# Altium PCB Test.PcbDoc
Units mil, origin at the board's own origin, x right, y up, seen from the top; angles counter-clockwise.
Board outline 5858 x 3543 mil, 2 copper layers (Top Layer, Bottom Layer); 36 components, 38 nets, 182 pads, 0 vias.
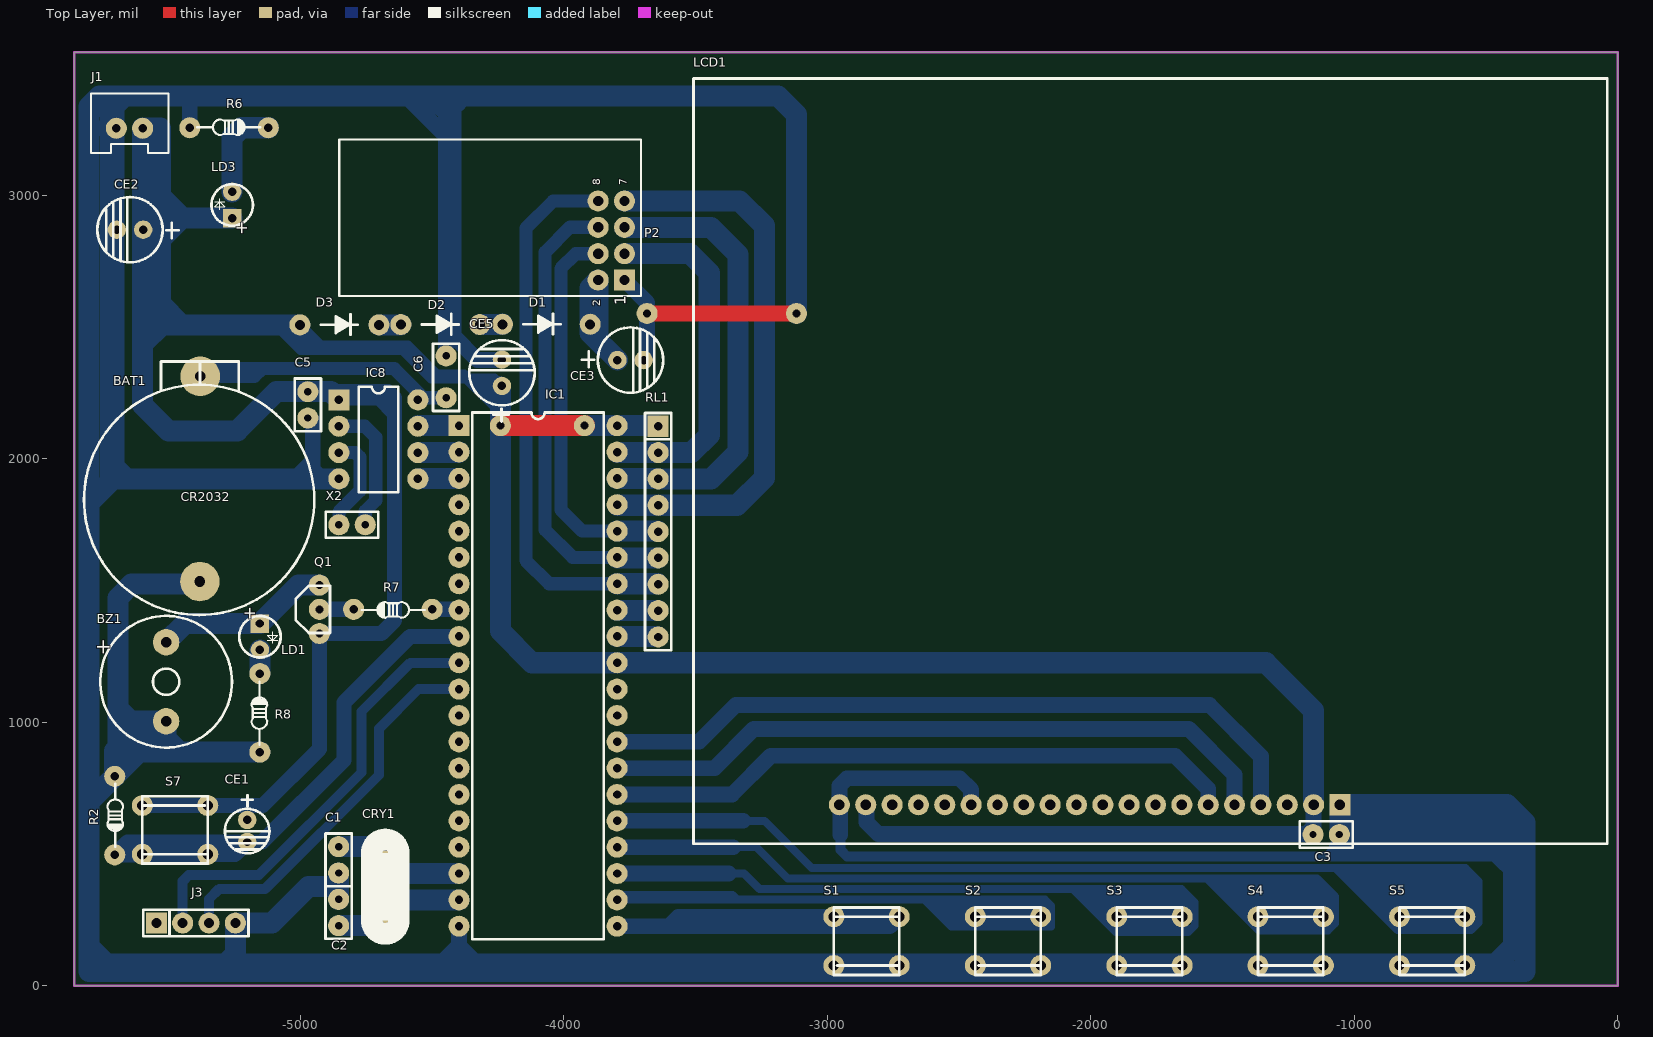
[diagram p0: Top Layer view]
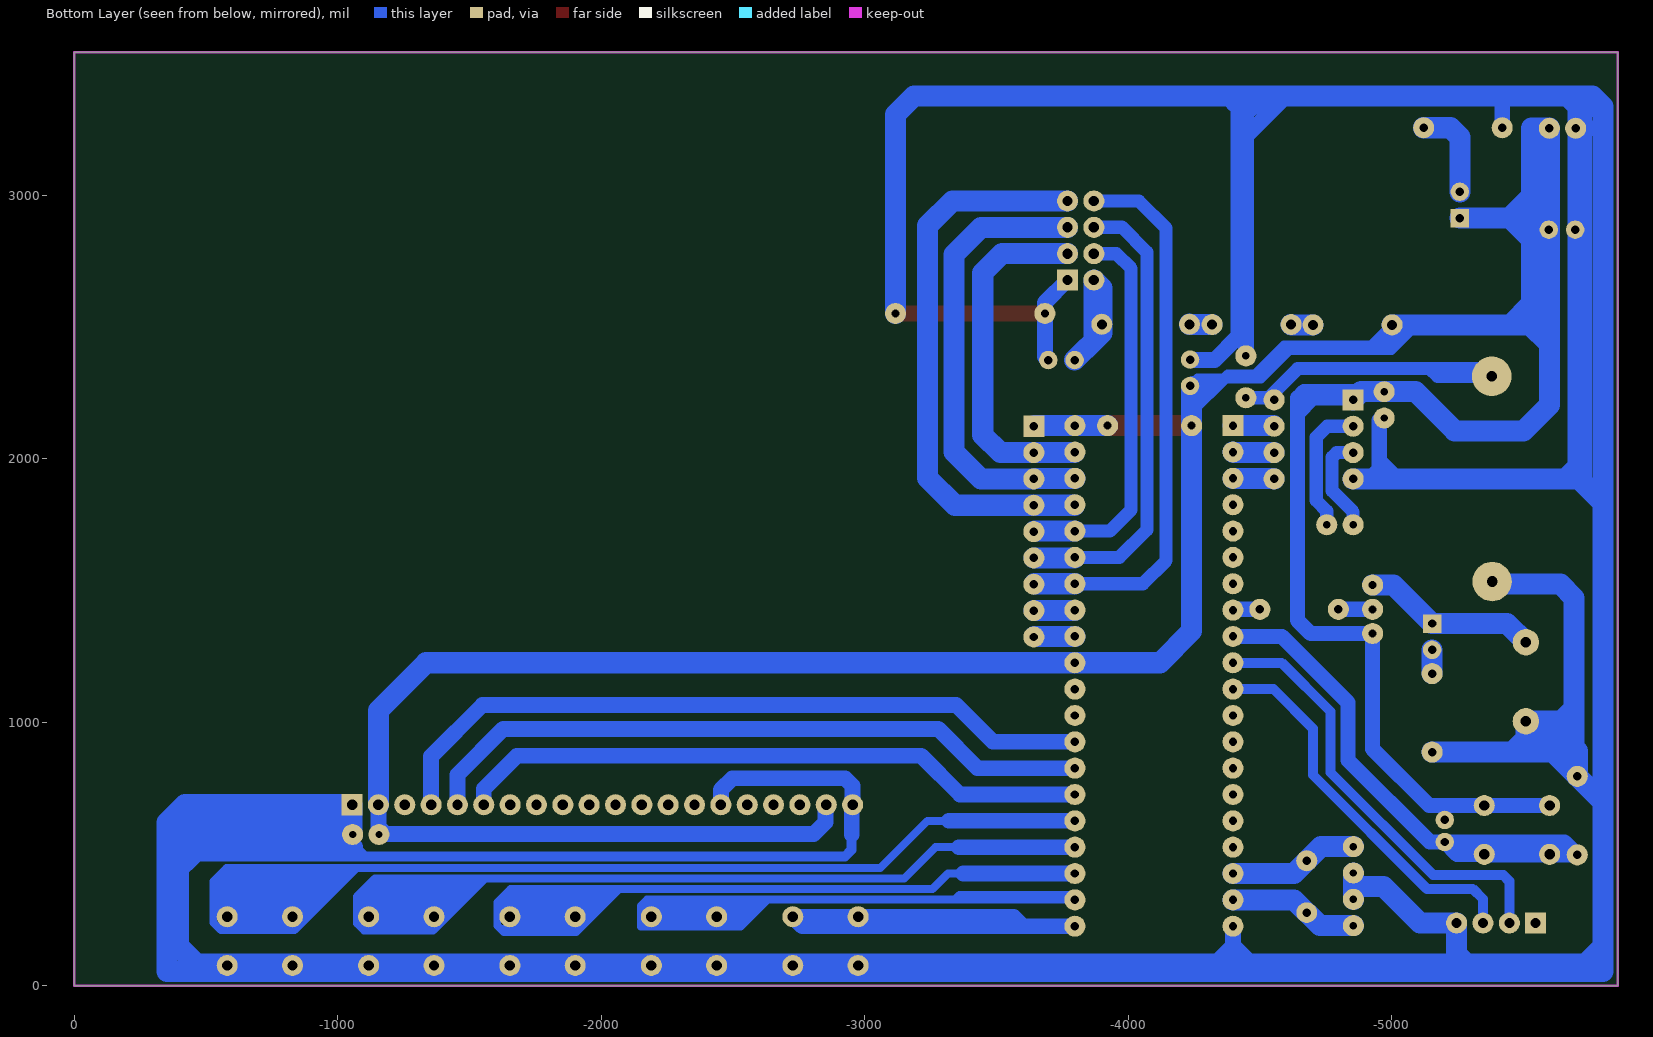
[diagram p1: Bottom Layer view, seen from below]
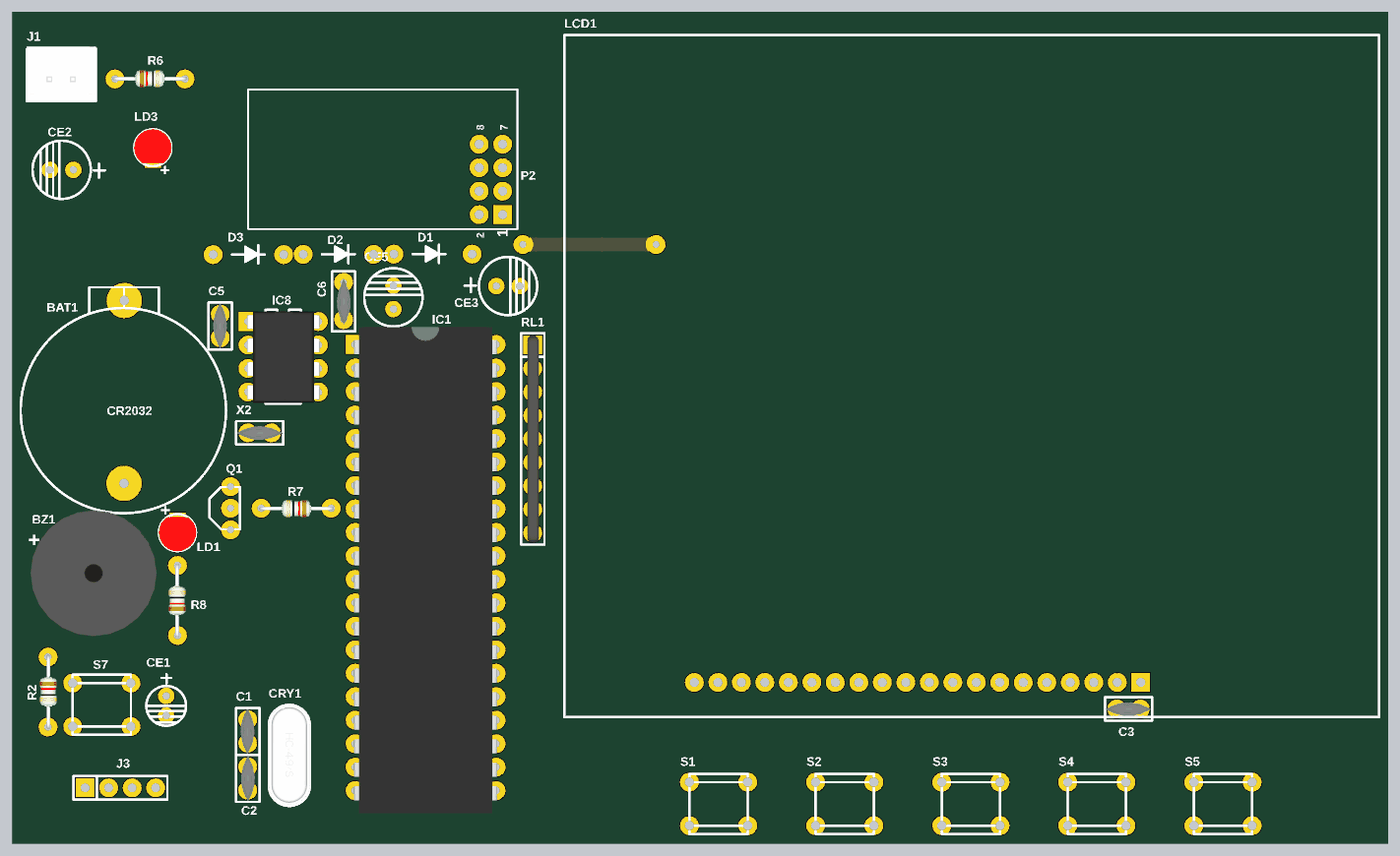
[diagram p2: 3D render of the assembled board from above, using the file's embedded part models]

## Layer stack, top to bottom
Top Layer: signal copper 1.4
Dielectric: dielectric 12.6, FR-4, Dk 4.8
Bottom Layer: signal copper 1.4

## Board outline
-5858,0 0,0 0,3543 -5858,3543

## Design rules (kind name [scope] priority, off if disabled: settings)
Clearance [InNet('No Net') vs InNet('No Net')] p1: gap=10
ComponentClearance [InNet('No Net') vs InNet('No Net')] p1: gap=10 collisioncheckmode=3 verticalgap=10 showdistances=FALSE
FabricationTestpoint [(IsPad And (OnTopLayer Or OnBottomLayer))] p1: side=3 testpointundercomponent=TRUE minsize=40 maxsize=100 preferedsize=60 minholesize=0 maxholesize=40 preferedholesize=32 testpointgrid=1 allowsidetop=TRUE allowsidebottom=TRUE usegrid=TRUE gridtolerance=0.01
MinimumSolderMaskSliver [InNet('No Net') vs InNet('No Net')] p1: minsoldermaskwidth=10
PolygonConnect [All] p1: connectstyle=Relief reliefconductorwidth=10 reliefentries=4 polygonreliefangle="90 Angle"
RoutingVias [All] p1: holewidth=28 width=50 viastyle="Through Hole" minholewidth=28 minwidth=50 maxholewidth=28 maxwidth=50
SilkToSilkClearance [InNet('No Net') vs InNet('No Net')] p1: silktosilkclearance=10
SilkscreenOverComponentPads [InNet('No Net') vs InNet('No Net')] p1: minsilkscreentomaskgap=10
SolderMaskExpansion [All] p1: expansion=4
Width [All] p1: maxlimit=100 minlimit=10 preferedwidth=10
23 further rules are at their usual default settings.

## Components (designator, comment, footprint, x,y, rotation, side; value= is the part's Value field where it differs from the comment)
BAT1 "BATTERY" CR2032 -5401,1944 r0 top
BZ1 "BUZZER" BUZZER1 -5510,1154 r270 top
C1 "22pF" RAD0.1#1 -4855,478 r90 top
C2 "22pF" RAD0.1#1 -4855,278 r270 top
C3 "0.1uF" RAD0.1#1 -1106,574 r180 top
C5 "0.1uF" RAD0.1#1 -4972,2205 r90 top
C6 "0.1uF" RAD0.1#2 -4447,2282 r270 top
CE1 "1uF" RB.1/.1 -5202,587 r0 top
CE2 "220uF" RB.1/.2 -5647,2870 r270 top
CE3 "220uF" RB.1/.2 -3747,2375 r90 top
CE5 "220uF" RB.1/.2 -4235,2327 r180 top
CRY1 "12.00MHz" XTAL1 -4678,376 r270 top
D1 "1N4007" DIODE0.3#1 -4083,2511 r0 top
D2 "1N4007" DIODE0.3#2 -4469,2510 r0 top
D3 "1N4007" DIODE0.3#2 -4852,2509 r0 top
IC1 "AT89C52" DIP40 -4098,1176 r0 top
IC8 "DS1302" DIP8 -4854,2224 r0 top
J1 "CON2" HJ2P2.54 -5599,3255 r180 top
J3 "CON4" SIP4 -5397,238 r0 top
LCD1 "LCD12864-ST79xx" SIP20 -2004,687 r180 top
LD1 "LED" LED3F-R -5154,1325 r270 top
LD3 "LED" LED3F-R -5259,2964 r90 top
P2 "NRF24l01" HDR2.54-2X4 -3770,2679 r90 top (schematic designator P1)
Q1 "8550" TO-92B -4928,1429 r270 top (schematic designator Q2)
R2 "10K" AXIAL0.3 -5705,646 r270 top
R6 "1K" AXIAL0.3 -5271,3257 r0 top
R7 "1K" AXIAL0.3 -4649,1429 r180 top
R8 "1K" AXIAL0.3 -5154,1036 r90 top
RL1 "10K排阻" RES9P -3755,1743 r270 top
S1 "SW-PB" SW-PB4DS -2727,77 r180 top
S2 "SW-PB" SW-PB4DS -2190,77 r180 top
S3 "SW-PB" SW-PB4DS -1653,77 r180 top
S4 "SW-PB" SW-PB4DS -1117,77 r180 top
S5 "SW-PB" SW-PB4DS -580,77 r180 top
S7 "Rst" SW-PB4DS -5600,684 r0 top
X2 "32.768KHz" RAD0.1#1 -4804,1750 r180 top

## Footprints (in the part's own frame and the unit in brackets; to place one, negate y for a bottom-side part, rotate by r counter-clockwise, add the part's x,y. Pads: shape width x height; smd on the part's side, far side on the other; paste and mask are expansions set on the pad)
AXIAL0.3 [mil]
  round 80 hole 32: 1(-149,0) 2(149,0)
  silkscreen extent -121,-28 119,32, body extent -158,-34 156,37, height 95
BUZZER1 [mil]
  round 100 hole 40: 1(-150,0) 2(150,0)
  silkscreen extent -250,-250 250,250, body extent -268,-271 272,269, height 299
CR2032 [mil]
  round 150 hole 40: 1(20.5,369.5) 2(19.5,-409.5)
  silkscreen extent -421,-537 454,426
DIODE0.3#1 [mil]
  round 80 hole 38: A(-150,0) K(183,0)
  silkscreen extent -70,-38 70,40
DIODE0.3#2 [mil]
  round 80 hole 38: A(-150,0) K(150,0)
  silkscreen extent -70,-38 70,40
DIP8 [mil]
  rect 80x80 hole 32: 1(0,0)
  round 80 hole 32: 2(0,-100) 3(0,-200) 4(0,-300) 5(300,-300) 6(300,-200) 7(300,-100) 8(300,0)
  silkscreen extent 75,-350 225,50, body extent -3,-347 305,43, height 180
DIP40 [mil]
  rect 80x80 hole 32: 1(-300,950)
  round 80 hole 32: 2(-300,850) 3(-300,750) 4(-300,650) 5(-300,550) 6(-300,450) 7(-300,350) 8(-300,250) 9(-300,150) 10(-300,50) 11(-300,-50) 12(-300,-150) 13(-300,-250) 14(-300,-350) 15(-300,-450) 16(-300,-550) 17(-300,-650) 18(-300,-750) 19(-300,-850) 20(-300,-950) 21(300,-950) 22(300,-850) 23(300,-750) 24(300,-650) 25(300,-550) 26(300,-450) 27(300,-350) 28(300,-250) 29(300,-150) 30(300,-50) 31(300,50) 32(300,150) 33(300,250) 34(300,350) 35(300,450) 36(300,550) 37(300,650) 38(300,750) 39(300,850) 40(300,950)
  silkscreen extent -250,-1000 250,1000, body extent -305,-1046 305,1025, height 196
HDR2.54-2X4 [mil]
  rect 80x80 hole 39.37: 1(0,0)
  round 80 hole 39.37: 2(0,100) 3(100,0) 4(100,100) 5(200,0) 6(200,100) 7(300,0) 8(300,100)
  silkscreen extent -61,-63 533,1083
HJ2P2.54 [mm]
  round 0.2 on Top Overlay: 1(-2.5,2.364) 1(-2.5,2.364) 1(-2.5,-3.336) 1(-2.5,-3.336) 1(-0.5,2.364) 1(-0.5,2.364) 1(-0.5,1.536) 1(-0.5,1.536) 1(3.048,1.536) 1(3.048,1.536) 1(3.048,2.364) 1(3.048,2.364) 1(5,2.364) 1(5,2.364) 1(5,-3.336) 1(5,-3.336)
  round 2.032 hole 0.8: 1(0,0) 2(2.54,0)
  silkscreen extent -2.5,-3.34 5,2.36, body extent -2.48,-3.55 5.02,2.45, height 7
LED3F-R [mil]
  rect 70x70 hole 32: A(-50,0)
  round 70 hole 32: K(50,0)
  silkscreen extent -79,-79 79,79, body extent -67,-80 80,80, height 236
RAD0.1#1 [mil]
  round 80 hole 28: 1(50,0) 2(-50,0)
  silkscreen extent -100,-50 100,50, body extent -98,-28 98,30, height 217
RAD0.1#2 [mil]
  round 80 hole 28: 1(50,0) 2(-109,0)
  silkscreen extent -155,-50 100,50, body extent -123,-28 73,30, height 217
RB.1/.1 [mil]
  round 70 hole 32: 1(0,42.37) 2(0,-41.37)
  silkscreen extent -84,-85 85,136
RB.1/.2 [mil]
  round 70 hole 32: 1(0,50) 2(0,-50)
  silkscreen extent -124,-124 124,185, body extent -124,-124 124,124, height 240
RES9P [mil]
  rect 80x80 hole 32: 1(-381,113)
  round 80 hole 32: 2(-281,113) 3(-181,113) 4(-81,113) 5(19,113) 6(119,113) 7(219,113) 8(319,113) 9(419,113)
  silkscreen extent -431,63 469,163, body extent -424,90 462,139, height 169
SIP4 [mil]
  rect 80x80 hole 38: 1(-150,0)
  round 80 hole 38: 2(-50,0) 3(50,0) 4(150,0)
  silkscreen extent -200,-50 200,50, body extent -200,-49 200,50, height 315
SIP20 [mil]
  rect 80x80 hole 39.37: 1(-950,0)
  round 80 hole 39.37: 2(-850,0) 3(-750,0) 4(-650,0) 5(-550,0) 6(-450,0) 7(-350,0) 8(-250,0) 9(-150,0) 10(-50,0) 11(50,0) 12(150,0) 13(250,0) 14(350,0) 15(450,0) 16(550,0) 17(650,0) 18(750,0) 19(850,0) 20(950,0)
  silkscreen extent -1965,-2757 1504,148
SW-PB4DS [mil]
  round 80 hole 39.37: 1(0,0) 1(248.03,0) 2(248.03,-185.04)
  round 80 hole 40: 2(0,-185.04)
  silkscreen extent 0,-220 248,36, body extent -6,-221 254,35, height 236
TO-92B [mil]
  round 80 hole 30: BASE(0,0) COLL(-92,0) EMIT(92,0)
  silkscreen extent -90,-90 90,40, body extent -91,-90 90,40, height 315
XTAL1 [mm]
  round 2.032 hole 0.8: 1(-2.5,0)
  round 2 hole 0.8: 2(2.5,0)
  silkscreen extent -5.5,-2.25 5.5,2.26, body extent -5.45,-2.26 5.35,2.24, height 3.5

## Part data
C1 C2: library part CAP, "Capacitor"
C3 C5 C6: library part CAP
CE1 CE2 CE3 CE5: library part ELECTRO1
CRY1 X2: library part CRYSTAL
D1 D2 D3: library part DIODE
IC1: library part AT89C51
J3: library part Con4
P2: library part "Header 4X2", "Header, 4-Pin, Dual row"
Q1: library part PNP1
R2 R6 R7 R8: library part RES1
RL1: library part RESL1
S7: library part SW-PB

## Free pads (board coordinates)
  round 80 hole 30: 0(-3684,2552) 1(-3117,2552) 2(-3922,2126) 3(-4241,2126)

## Nets (pads, with @x,y where several pads share a name; then routed paths per layer and width w, separated by ;. In a path a pad name is that pad's centre, name@x,y a point inside that pad or via, vN(x,y) a via of type N, cw(c..) or ccw(c..) an arc to the next point about the centre after c; other vN are vias at no path point)
BATT: BAT1.1 C6.1 IC8.8 | length 1559.4
  Bottom Layer w50: -5307,2343 -5066,2343 ; C6.1 -4533,2232 -4644,2343 -5066,2343 ; -5066,2343 -5145,2343 -5174.5,2313.5 BAT1.1 -5351,2343 -5066,2343
BUZZER: IC1.8 R7.1 | length 103.2
  Bottom Layer w60: R7.1 -4401,1429 IC1.8
CE: IC1.39 P2.3 RL1.2 | length 1342.4
  Bottom Layer w80: IC1.39@-3796,2024 RL1.2 -3515,2024 -3448,2091 -3448,2705 -3522,2779 P2.3
CSN: IC1.36 P2.4 RL1.5 | length 1566.7
  Bottom Layer w38: -3884,1726 IC1.36
  Bottom Layer w50: P2.4 -3955,2779 -4011,2723 -4011,1807 -3930,1726 IC1.36
  Bottom Layer w80: IC1.36 RL1.5@-3644,1726
DSIO: IC1.2 IC8.6 | length 156.8
  Bottom Layer w80: IC8.6 -4400,2024 IC1.2
DSRST: IC1.3 IC8.5 | length 156.8
  Bottom Layer w80: IC8.5 -4552,1926 IC1.3
DSSCK: IC1.1 IC8.7 | length 154
  Bottom Layer w80: IC8.7@-4552,2126 IC1.1
GND: BAT1.2 BZ1.2 C1.2 C2.2 C3.2 C5.2 C6.2 CE2.2 CE3.2 CE5.2 IC1.20 IC8.4 J1.2 J3.4 LCD1.1 LCD1.15 LCD1.20 P2.1 pad.0 pad.1 R2.1 R6.1 R8.1 S1.1 S2.1 S3.1 S4.1 S5.1 | length 46738.9
  Top Layer w60: pad.0 pad.1
  Bottom Layer w38: -2949,574 -2949,515.04 -2925,491.04 -1143,491.04 ; LCD1.1 -1054,539 -1101.96,491.04 -1143,491.04 ; -405,427 -456.5,478.5 ; -405,502 -428.5,478.5 -456.5,478.5 ; -1143,491.04 -469.04,491.04 -456.5,478.5
  Bottom Layer w60: -5803,1832 -5731,1904 ; -5800,3255 J1.2 ; -5781,3360 -5731,3310 -5731,1904 ; R6.1 -5420,3362 -5436,3378 -5654,3378 -5697,3335 CE2.2 -5697,1974 -5647,1924 -5091,1924 ; -5020,1924 -4953,1991 -4953,2146 -4953,1960 -4917,1924 IC8.4 -5091,1924 ; -4601,3378 -4494,3271 -4418,3195 -4418,3118 ; -4494,3377 -4494,3337 -4473,3337 -4443,3307 ; -4470,82 -4398,154 IC1.20 -4398,152 -4323,77 -469,77 -405,141 -405,502 ; C6.2 -4447,3303 -4443,3307 ; -4397.5,3352.5 -4418,3332 -4418,2465 -4328,2375 CE5.2@-4235,2375 ; -4372,3378 -4443,3307 ; P2.1 -3684,2593 pad.0 -3684,2388 CE3.2 ; pad.1 -3117,3281 ; -2951,574 -2951,684 LCD1.20 -2954,759 -2925,788 -2498,788 -2454,744 LCD1.15 ; -1065,528 -431,528 -405,502 ; C3.2 -1048,566 -405,566 ; -1054,633 -1043.5,643.5 -442.5,643.5 ; -1024,606 -405,606 ; -418,686 -419,687 LCD1.1 -486,687 -442.5,643.5 ; -5731,1904 -5711,1924 -5091,1924 ; -442.5,643.5 -405,606 ; -405,502 -405,566 ; -405,566 -405,606
  Bottom Layer w80: -5803,1832 -5711,1924 IC8.4 ; R2.1@-5693,807 -5693,1250 ; -5635.5,960.5 -5613,938 -5510,938 ; BAT1.2@-5369.5,1524.5 -5640.5,1524.5 -5693,1472 -5693,1250 ; R8.1 -5215,887 ; C2.2 -4855,377 ; C1.2 -4855,377 ; pad.1 -3117,3308 -3187,3378 -5763,3378 -5803,3338 -5803,604 ; C3.2 -1054,576 LCD1.1 -419,687 -418,686 ; -436,686 -418,686 ; -405,141 -464,82 -5422,82 ; -5803,423 -5803,55 -351,55 -351,619 -418,686 ; -5803,423 -5803,604 ; -5803,423 -5803,149 -5736,82 -5422,82 ; -5803,604 -5803,697 R2.1 ; R2.1 -5613,887 -5215,887 ; R2.1 -5705,891 ; -5705,891 -5701,887 -5288,887 ; -5705,891 -5592,1004 ; -5693,1250 -5693,1052 -5645,1004 -5592,1004 ; -5592,1004 BZ1.2 -5510,938 ; -5510,938 -5459,887 -5288,887 ; -5422,82 -5285,82 -5247,120 J3.4 -5108,238 -4969,377 -4855,377 ; -5288,887 -5215,887
IRQ: IC1.34 P2.8 RL1.7 | length 2323.1
  Bottom Layer w38: -4006,1526 IC1.34
  Bottom Layer w50: P2.8 -4041,2979 -4144,2876 -4144,1614 -4056,1526 IC1.34
  Bottom Layer w80: IC1.34 RL1.7@-3644,1526
LCD_CS: IC1.28 LCD1.4 | length 2766.8
  Bottom Layer w60: IC1.28 -3487,926 -3347,1066 -1549,1066 -1354,871 LCD1.4
LCD_SCK: IC1.26 LCD1.6 | length 2417.1
  Bottom Layer w60: IC1.26 -3362,726 -3215,873 -1680,873 -1554,747 LCD1.6
LCD_SID: IC1.27 LCD1.5 | length 2591.8
  Bottom Layer w60: IC1.27 -3428,826 -3279,975 -1628,975 -1454,801 LCD1.5
LED: BZ1.1 LD1.A Q1.COLL | length 1343.8
  Bottom Layer w58: BZ1.1 -5439,1375 LD1.A -5008,1521 Q1.COLL
  Bottom Layer w80: BZ1.1 -5439,1375 LD1.A -5008,1521 Q1.COLL
MCU_RST: CE1.2 IC1.9 R2.2 S7.2 | length 2301.8
  Bottom Layer w58: IC1.9 -4584,1326 -4835,1075 -4835,856 -5145.37,545.63 CE1.2 ; CE1.2 -5248.67,498.96 -5351.97,498.96 -5353.93,497 R2.2 -5656.37,545.63 CE1.2
MISO: IC1.37 P2.7 RL1.4 | length 2127
  Bottom Layer w80: IC1.37@-3796,1824 RL1.4 -3343,1824 -3239,1928 -3239,2885 -3333,2979 P2.7
MOSI: IC1.35 P2.6 RL1.6 | length 1765
  Bottom Layer w50: P2.6 -3977,2879 -4071,2785 -4071,1730 -3967,1626 IC1.35
  Bottom Layer w80: IC1.35@-3796,1624 RL1.6
NetCE3_1: CE3.1 D1.K P2.2 | length 693.3
  Bottom Layer w80: D1.K@-3900,2478 D1.K -3900,2649 P2.2 -3870,2448 CE3.1 D1.K@-3900,2478
NetD1_A: D1.A D2.K | length 86.4
  Bottom Layer w80: D2.K -4234,2510 D1.A
NetD2_A: D2.A D3.K | length 83.4
  Bottom Layer w80: D3.K -4620,2509 D2.A
NetIC1_10: IC1.10 J3.2 | length 1686.7
  Bottom Layer w38: J3.2 -5447,397 -5424,420 -5158,420 -4768,810 -4768,1041 -4583,1226 IC1.10
NetIC1_11: IC1.11 J3.3 | length 1473.2
  Bottom Layer w38: J3.3 -5347,329 -5308,368 -5134,368 -4702,800 -4702,976 -4552,1126 IC1.11
NetIC1_21: IC1.21 S1.2 | length 1974.9
  Bottom Layer w60: IC1.21 -2763.04,226 -2727,262.04 -3564.96,262.04 -3601,226
NetIC1_22: IC1.22 S2.2 | length 3855.6
  Bottom Layer w30: -3342,327.04 -3359.96,345 -3779,345 IC1.22 -3796.96,327.04 -2658,327.04 ; -2584,303 -2150,303 ; -2548,327.04 -2174.04,327.04 -2150,303 ; S2.2@-2438.03,262.04 -2503.03,327.04 -2658,327.04 ; -2658,327.04 -2632.04,327.04 -2529,224 -2150,224 -2150,303
  Bottom Layer w60: -2563,287 -2553,287 -2528.04,262.04 -2296,262.04 ; S2.2@-2438.03,262.04 -2296,262.04 ; S2.2@-2190,262.04 -2296,262.04
NetIC1_23: IC1.23 S3.2 | length 4972
  Bottom Layer w30: IC1.23 -3316,426 -3257.04,367.04 -2051,367.04 ; -2068,367.04 -1903.96,203 -1631,203 -1605,229 -1605,316 -1656.04,367.04 -2051,367.04 ; S3.2@-1901.03,262.04 -2006.03,367.04 -2051,367.04 ; -1637,219 -1885,219 -2033.04,367.04 -2051,367.04
  Bottom Layer w60: IC1.23 -3374,426 ; -1926,309 -1917,300 -1633,300 -1671,338 -1977,338 -1901.03,262.04 -1820,262.04 S3.2@-1653,262.04
NetIC1_24: IC1.24 S4.2 | length 6087.9
  Bottom Layer w30: IC1.24 -3269,526 -3150.04,407.04 -1141.04,407.04 -1073,339 -1073,237 -1100,210 -1361.96,210 -1559,407.04 ; -1523.04,407.04 -1340,224 -1098,224 ; -1510.03,407.04 S4.2@-1365.03,262.04
  Bottom Layer w60: IC1.24 -3358,526 ; -1481.5,378.5 -1134.5,378.5 -1105,349 -1451.99,349 -1417.5,314.5 -1104.5,314.5 -1092,302 -1131.96,262.04 -1171,262.04 ; S4.2@-1365.03,262.04 -1171,262.04 ; S4.2@-1117,262.04 -1171,262.04
NetIC1_25: IC1.25 S5.2 | length 7159.9
  Bottom Layer w30: IC1.25 -3238,626 -3059.04,447.04 -1049,447.04 ; -1072,447.04 -835.96,211 -556,211 -548.5,218.5 ; -1013.03,447.04 S5.2@-828.03,262.04 ; -1049,447.04 -1035,447.04 -850,262.04 S5.2@-828.03,262.04 ; -1049,447.04 -578.04,447.04 -527,396 -527,240 -548.5,218.5 ; S5.2@-828.03,262.04 -794.99,229 -559,229 -548.5,218.5
  Bottom Layer w60: IC1.25 -3320,626 ; -579,353 -918.99,353 -978.5,412.5 -978,413 -599,413 -563.49,377.49 S5.2@-563.49,278.55 ; S5.2@-563.49,278.55 -580,262.04 -754,262.04 -828.03,262.04 -879.48,313.49 -563.49,313.49 S5.2@-563.49,278.55
NetIC1_32: IC1.32 RL1.9 | length 154
  Bottom Layer w80: IC1.32 RL1.9@-3644,1326
NetIC1_33: IC1.33 RL1.8 | length 154
  Bottom Layer w80: IC1.33@-3796,1424 RL1.8
NetIC8_2: IC8.2 X2.2 | length 506
  Bottom Layer w50: IC8.2 -4756,2124 -4714,2082 -4714,1842 -4754,1802 X2.2
NetIC8_3: IC8.3 X2.1 | length 376.6
  Bottom Layer w50: X2.1 -4854,1799 -4774,1879 -4774,2006 -4792,2024 IC8.3
NetLD1_K: LD1.K R8.2 | length 90
  Bottom Layer w80: R8.2 LD1.K
NetLD3_K: LD3.K R6.2 | length 358.9
  Bottom Layer w80: LD3.K -5259,3221 -5223,3257 R6.2
NetQ1_BASE: Q1.BASE R7.2 | length 130
  Bottom Layer w58: Q1.BASE R7.2
OSC1: C2.1 CRY1.2 IC1.19 | length 497.6
  Bottom Layer w80: C2.1 -4727.57,228 -4629.57,326 IC1.19
OSC2: C1.1 CRY1.1 IC1.18 | length 499.2
  Bottom Layer w80: C1.1 -4731.57,528 -4629.57,426 IC1.18
SCK: IC1.38 P2.5 RL1.3 | length 1722.9
  Bottom Layer w80: IC1.38 RL1.3@-3644,1926 ; P2.5 -3442,2879 -3339,2776 -3339,2026 -3441,1924 RL1.3
VCC: C3.1 C5.1 CE1.1 CE2.1 CE5.1 D3.A IC1.31 IC1.40 IC8.1 J1.1@-5599,3255 LCD1.2 LCD1.19 LD3.A pad.2 pad.3 Q1.EMIT RL1.1 S7.1 | length 19823.7
  Top Layer w80: pad.3 pad.2
  Bottom Layer w30: -5069,2509 -4974,2414 -4943,2414 ; -4937.82,2444.82 -4928,2435 -4591,2435 -4570,2414 ; -4661,2414 -4570,2414 ; -4241,2171 -4375,2305 -4435,2305 ; -4241,2208 -4338,2305 -4357,2305 ; CE5.1 -4263,2305 -4435,2305 ; -4943,2414 -4890,2414 ; -4943,2414 -5002,2473 D3.A -4907,2414 -4890,2414 ; -4890,2414 -4613,2414 -4504,2305 -4435,2305 ; -4570,2414 -4480.5,2324.5 -4376.5,2324.5 -4357,2305 ; -4435,2305 -4357,2305
  Bottom Layer w38: -5094,2509 -4999,2414 -4766,2414 ; D3.A -4907,2414 -4766,2414 ; -4297,2305 -4267,2275 -4248,2275 -4278,2305 -4298,2305 ; CE5.1 -4263,2305 -4298,2305 ; -4766,2414 -4613,2414 -4504,2305 -4298,2305
  Bottom Layer w58: S7.1@-5600,684 -5143,684 -4928,899 Q1.EMIT -4693,1337 -4643,1387 -4643,2034 ; -5027,2255 -4668,2255 -4643,2230 -4643,2207 -4643,2034 ; C5.1 -4885,2255 IC8.1 -4846,2232 -4715,2232 ; -4643,2173 -4702,2232 -4715,2232 ; -4715,2232 -4643,2232 -4643,2034
  Bottom Layer w60: LCD1.19 -2851,684 -2851,621 -2806,576 -1182,576 -1154,604 LCD1.2
  Bottom Layer w80: -5599,2432 -5599,2436 -5526,2509 -5277,2509 ; -5599,2825 -5510,2914 -5347,2914 ; -5599,2998 -5515,2914 -5347,2914 ; -5590,2914 -5347,2914 ; -5532,2832 -5450,2914 -5347,2914 ; -5532,2998 -5448,2914 -5347,2914 ; LD3.A -5347,2914 ; IC8.1 -4885,2255 -5091,2255 -5240,2106 -5500,2106 -5599,2205 -5599,2706 ; CE5.1@-4248,2275 -4241,2268 -4241,2171 -4241,1346 -4121,1226 IC1.31 -1335,1226 -1154,1045 LCD1.2 ; pad.2 -3738,2126 ; IC1.40 -3738,2126 ; RL1.1@-3644,2126 -3738,2126 ; -5599,2706 -5599,3255 -5532,3255 -5532,2589 -5452,2509 -5277,2509 ; -5599,2706 -5599,2620 -5488,2509 D3.A -5277,2509
VO: LCD1.3
pads on no net: IC1.4 IC1.5 IC1.6 IC1.7 IC1.12 IC1.13 IC1.14 IC1.15 IC1.16 IC1.17 IC1.29 IC1.30 J1.1@-5500.57,3161.91 J1.1@-5500.57,3386.32 J1.1@-5579.32,3161.91 J1.1@-5579.32,3194.53 J1.1@-5719,3161.91 J1.1@-5719,3194.53 J1.1@-5795.85,3161.91 J1.1@-5795.85,3386.32 J3.1 LCD1.7 LCD1.8 LCD1.9 LCD1.10 LCD1.11 LCD1.12 LCD1.13 LCD1.14 LCD1.16 LCD1.17 LCD1.18

## Keep-outs
Keep-Out Layer:
  the board outline again, w10

## Text inside footprints (layer, text, board x,y; h text height)
BAT1: Top Overlay "CR2032" at -5455,1826 h60
BZ1: Top Overlay "+" at -5793,1319 h100 r270
LD1: Top Overlay "+" at -5229,1441 h80 r270
LD3: Top Overlay "+" at -5184,2848 h80 r90
P2: Top Overlay "2" at -3850,2579 h50 r90; Top Overlay "1" at -3750,2584 h70 r90; Top Overlay "7" at -3750,3039 h50 r90; Top Overlay "8" at -3850,3039 h50 r90